# Altium PCB IOT_IO_v0.PcbDoc (part 2 of 3)
Units mil, origin at the board's own origin, x right, y up, seen from the top; angles counter-clockwise.
Board outline 8196.85 x 3393.7 mil, 2 copper layers (Top Layer, Top, Bottom Layer, Bottom); 364 components, 308 nets, 1129 pads, 291 vias.
Unrouted connection lines stored in the file: 7.
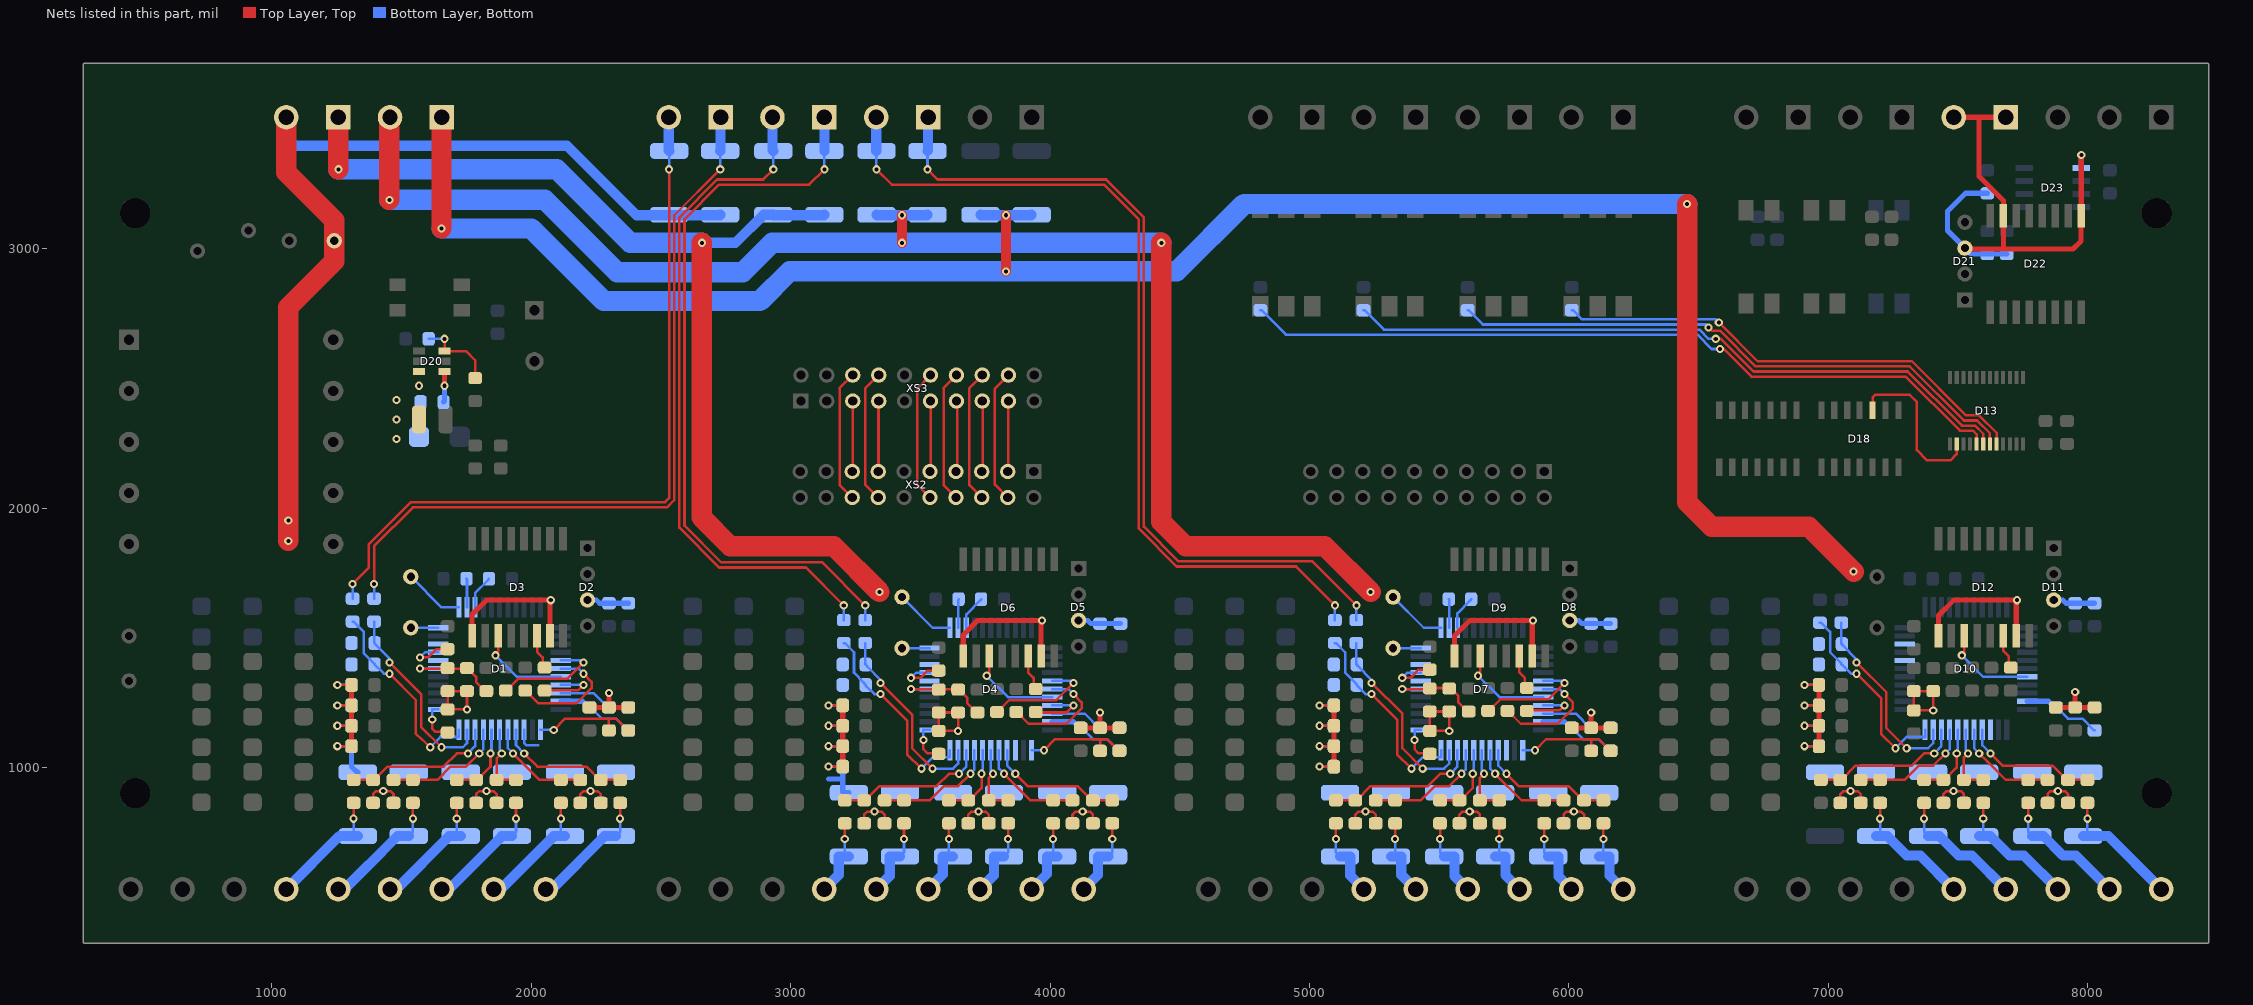
[diagram p2: the nets of this part, all layers, seen from the top]

## Via types
v1: diameter 31.5, hole 15.75, Top Layer, Top to Bottom Layer, Bottom, 291 vias

## Nets (pads, with @x,y where several pads share a name; then routed paths per layer and width w, separated by ;. In a path a pad name is that pad's centre, name@x,y a point inside that pad or via, vN(x,y) a via of type N, cw(c..) or ccw(c..) an arc to the next point about the centre after c; other vN are vias at no path point) (continued)
GND1: C1.1 C2.2 C3.2 C4.2 C5.2 C6.2 C7.2 C8.1 C9.1 C10.1 C11.1 C12.1 C13.1 C14.2 C15.1 C16.1 C17.1 C69.1 C70.1 C71.1 C72.1 D1.3 D1.18 D1.20 D1.43 D2.3 D3.9 D3.15 FU1.1 R2.1 R3.2 R4.2 R5.2 R6.2 R7.2 R8.2 R9.2 R10.2 R137.1 R138.1 R139.1 R140.1 XT22.2 | length 6540.2
  Top Layer, Top w9.84: v1(1251.97,1082.68) C69.1@1307.09,1082.68 ; v1(1251.97,1161.42) C70.1@1307.09,1161.42 ; v1(1251.97,1240.16) C71.1@1307.09,1240.16 ; v1(1251.97,1318.9) C72.1@1307.09,1318.9 ; C6.2@1389.76,864.17 1389.76,897.64 1401.57,909.45 v1(1429.13,909.45) 1456.69,909.45 1468.5,897.64 C7.2@1468.5,864.17 ; C4.2@1787.4,864.17 1787.4,897.64 1799.21,909.45 v1(1826.77,909.45) 1854.33,909.45 1866.14,897.64 C5.2@1866.14,864.17 ; C2.2@2188.98,864.17 2188.98,897.64 2200.79,909.45 v1(2228.35,909.45) 2255.91,909.45 2267.72,897.64 C3.2@2267.72,864.17 ; C12.1@1677.17,1224.41 v1(1751.97,1224.41) R2.1@1751.97,1295.28 C1.1@1677.17,1295.28 C12.1@1677.17,1224.41
  Top Layer, Top w19.68: C69.1@1307.09,1082.68 C70.1@1307.09,1161.42 C71.1@1307.09,1240.16 C72.1@1307.09,1318.9 ; D3.9@1772.05,1509.25 1771.65,1509.65 1771.65,1590.55 1826.77,1645.67 v1(2074.8,1645.67) 2072.05,1644.49 D3.15@2072.05,1509.25 ; C17.1@2224.41,1232.28 C10.1@2299.21,1232.28 ; v1(2299.21,1287.4) C10.1@2299.21,1232.28 ; C11.1@2374.02,1232.28 C10.1@2299.21,1232.28
  Top Layer, Top w78.74: XT22.2@1055.12,3507.87 1055.12,3295.28 1240.16,3110.24 FU1.1@1240.16,3031.5 1240.16,2952.76 1062.99,2775.59 v1(1062.99,1952.76) v1(1062.99,1874.02)
  Bottom Layer, Bottom w9.84: v1(1251.97,1082.68) R137.1@1307.09,1082.68 ; v1(1251.97,1161.42) R138.1@1307.09,1161.42 ; v1(1251.97,1240.16) R139.1@1307.09,1240.16 ; v1(1251.97,1318.9) R140.1@1307.09,1318.9 ; D1.3@1972.44,1145.67 1972.44,1094.49 1980.32,1086.61 2027.56,1086.61 ; C15.1@2224.41,1232.28 2228.35,1232.28 2271.65,1188.98 2326.77,1188.98 2370.08,1145.67 2374.02,1145.67 C14.2@2374.02,1143.7
  Bottom Layer, Bottom w19.68: R137.1@1307.09,1082.68 1307.09,1003.94 1329.72,981.3 1330.71,980.32 R7.2@1330.71,982.28 ; D1.43@2114.17,1255.91 2196.85,1255.91 2220.47,1232.28 C15.1@2224.41,1232.28 ; D2.3@2216.54,1646.46 2217.32,1645.67 2251.97,1645.67 2263.78,1633.86 C13.1@2299.21,1633.86 C16.1@2374.02,1633.86
  Bottom Layer, Bottom w39.37: XT22.2@1055.12,3507.87 1055.12,3433.07 1090.55,3397.64 2137.8,3397.64 2405.51,3129.92 R10.2@2533.46,3129.92 ; R10.2@2531.5,3131.89 R10.2@2533.46,3129.92 ; R9.2@2728.35,3131.89 2726.38,3129.92 R10.2@2533.46,3129.92
GND2: C18.1 C19.2 C20.2 C21.2 C22.2 C23.2 C24.2 C25.1 C26.1 C27.1 C28.1 C29.1 C30.1 C31.2 C32.1 C33.1 C34.1 C73.1 C74.1 C75.1 C76.1 D4.3 D4.18 D4.20 D4.43 D5.3 D6.9 D6.15 R27.1 R28.2 R29.2 R30.2 R31.2 R32.2 R33.2 R34.2 R35.2 R141.1 R142.1 R143.1 R144.1 XT22.1 | length 6943.4
  Top Layer, Top w9.84: v1(3145.67,1003.94) C73.1@3200.79,1003.94 ; v1(3145.67,1082.68) C74.1@3200.79,1082.68 ; v1(3145.67,1161.42) C75.1@3200.79,1161.42 ; v1(3145.67,1240.16) C76.1@3200.79,1240.16 ; C23.2@3283.46,785.43 3283.46,818.9 3295.28,830.71 v1(3322.83,830.71) 3350.39,830.71 3362.2,818.9 C24.2@3362.2,785.43 ; C21.2@3685.04,785.43 3685.04,818.9 3696.85,830.71 v1(3724.41,830.71) 3751.97,830.71 3763.78,818.9 C22.2@3763.78,785.43 ; C19.2@4086.61,785.43 4086.61,818.9 4098.43,830.71 v1(4125.98,830.71) 4153.54,830.71 4165.35,818.9 C20.2@4165.35,785.43 ; C29.1@3570.87,1141.73 v1(3645.67,1141.73) R27.1@3645.67,1212.6 C18.1@3570.87,1212.6 C29.1@3570.87,1141.73
  Top Layer, Top w19.68: C73.1@3200.79,1003.94 C74.1@3200.79,1082.68 C75.1@3200.79,1161.42 C76.1@3200.79,1240.16 ; D6.9@3665.75,1430.51 3665.35,1430.91 3665.35,1511.81 3720.47,1566.93 v1(3968.5,1566.93) 3965.75,1565.75 D6.15@3965.75,1430.51 ; D5.3@4109.45,1566.93 D5.3@4110.24,1567.72 ; C34.1@4118.11,1153.54 C27.1@4192.91,1153.54 ; v1(4192.91,1212.6) C27.1@4192.91,1153.54 ; C28.1@4267.72,1153.54 C27.1@4192.91,1153.54
  Top Layer, Top w39.37: XT22.1@1255.12,3507.87 XT22.1@1255.91,3507.09
  Top Layer, Top w78.74: v1(1255.91,3307.09) XT22.1@1255.91,3507.09 ; v1(2657.48,3023.62) 2657.48,1964.57 2767.72,1854.33 3165.35,1854.33 v1(3342.52,1677.17)
  Bottom Layer, Bottom w9.84: v1(3145.67,1003.94) R141.1@3200.79,1003.94 ; v1(3145.67,1082.68) R142.1@3200.79,1082.68 ; v1(3145.67,1161.42) R143.1@3200.79,1161.42 ; v1(3145.67,1240.16) R144.1@3200.79,1240.16 ; C32.1@4118.11,1153.54 4122.05,1153.54 4165.35,1110.24 4220.47,1110.24 4263.78,1066.93 4265.75,1066.93 C31.2@4267.72,1064.96
  Bottom Layer, Bottom w19.68: 3145.67,956.69 3200.79,956.69 ; R141.1@3200.79,1003.94 3200.79,956.69 ; R32.2@3224.41,903.54 3202.76,903.54 3200.79,905.51 3200.79,956.69 ; D4.43@4007.87,1177.17 4090.55,1177.17 4114.17,1153.54 C32.1@4118.11,1153.54 ; D5.3@4110.24,1567.72 4111.02,1566.93 4145.67,1566.93 4157.48,1555.12 C30.1@4192.91,1555.12 C33.1@4271.65,1555.12
  Bottom Layer, Bottom w39.37: v1(2657.48,3023.62) 2787.4,3023.62 2895.67,3131.89 R35.2@2933.07,3131.89 2935.04,3129.92 3127.95,3129.92 R34.2@3129.92,3131.89
  Bottom Layer, Bottom w78.74: v1(1255.91,3307.09) 2098.43,3307.09 2381.89,3023.62 v1(2657.48,3023.62)
GND3: C35.1 C36.2 C37.2 C38.2 C39.2 C40.2 C41.2 C42.1 C43.1 C44.1 C45.1 C46.1 C47.1 C48.2 C49.1 C50.1 C51.1 C77.1 C78.1 C79.1 C80.1 D7.3 D7.18 D7.20 D7.43 D8.3 D9.9 D9.15 R52.1 R53.2 R54.2 R55.2 R56.2 R57.2 R58.2 R59.2 R60.2 R181.1 R182.1 R183.1 R184.1 XT18.2 | length 8423.1
  Top Layer, Top w9.84: v1(5039.37,1003.94) C77.1@5094.49,1003.94 ; v1(5039.37,1082.68) C78.1@5094.49,1082.68 ; v1(5039.37,1161.42) C79.1@5094.49,1161.42 ; v1(5039.37,1240.16) C80.1@5094.49,1240.16 ; C40.2@5177.17,785.43 5177.17,818.9 5188.98,830.71 v1(5216.54,830.71) 5244.09,830.71 5255.91,818.9 C41.2@5255.91,785.43 ; C38.2@5578.74,785.43 5578.74,818.9 5590.55,830.71 v1(5618.11,830.71) 5645.67,830.71 5657.48,818.9 C39.2@5657.48,785.43 ; C36.2@5980.31,785.43 5980.31,818.9 5992.13,830.71 v1(6019.69,830.71) 6047.24,830.71 6059.06,818.9 C37.2@6059.06,785.43 ; C46.1@5464.57,1141.73 C35.1@5464.57,1216.54 R52.1@5539.37,1216.54 v1(5539.37,1141.73) C46.1@5464.57,1141.73
  Top Layer, Top w19.68: C77.1@5094.49,1003.94 C78.1@5094.49,1082.68 C79.1@5094.49,1161.42 C80.1@5094.49,1240.16 ; D9.9@5559.45,1430.51 5559.45,1508.27 5618.11,1566.93 v1(5862.2,1566.93) 5859.45,1565.75 D9.15@5859.45,1430.51 ; D8.3@6003.15,1566.93 D8.3@6003.94,1567.72 ; C51.1@6011.81,1153.54 C44.1@6086.61,1153.54 ; v1(6086.61,1212.6) C44.1@6086.61,1153.54 ; C45.1@6161.42,1153.54 C44.1@6086.61,1153.54
  Top Layer, Top w39.37: v1(3429.13,3023.62) v1(3429.13,3129.92)
  Top Layer, Top w78.74: v1(1452.76,3188.98) 1452.76,3505.51 XT18.2@1455.12,3507.87 ; v1(4429.13,3023.62) 4429.13,1948.82 4523.62,1854.33 5059.06,1854.33 v1(5236.22,1677.17)
  Bottom Layer, Bottom w9.84: v1(5039.37,1003.94) R181.1@5094.49,1003.94 ; v1(5039.37,1082.68) R182.1@5094.49,1082.68 ; v1(5039.37,1161.42) R183.1@5094.49,1161.42 ; v1(5039.37,1240.16) R184.1@5094.49,1240.16 ; C49.1@6011.81,1153.54 6055.12,1110.24 6114.17,1110.24 6157.48,1066.93 6159.45,1066.93 C48.2@6161.42,1064.96
  Bottom Layer, Bottom w19.68: D7.43@5901.57,1177.17 5984.25,1177.17 6007.87,1153.54 C49.1@6011.81,1153.54 ; D8.3@6003.94,1567.72 6038.58,1567.72 6051.18,1555.12 C47.1@6086.61,1555.12 C50.1@6161.42,1555.12
  Bottom Layer, Bottom w39.37: R60.2@3330.71,3131.89 3332.68,3129.92 v1(3429.13,3129.92) 3525.59,3129.92 R59.2@3527.56,3131.89
  Bottom Layer, Bottom w78.74: v1(1452.76,3188.98) 2051.18,3188.98 2330.71,2909.45 2814.96,2909.45 2929.13,3023.62 v1(3429.13,3023.62) v1(4429.13,3023.62)
GND4: C52.1 C53.2 C54.2 C55.2 C56.2 C57.2 C58.2 C59.1 C60.1 C61.1 C62.1 C63.1 C64.1 C65.2 C66.1 C67.1 C68.1 C81.1 C82.1 C83.1 C84.1 D10.3 D10.18 D10.20 D10.43 D11.3 D12.9 D12.15 R77.1 R78.2 R79.2 R80.2 R81.2 R82.2 R83.2 R84.2 R85.2 R185.1 R186.1 R187.1 R188.1 XT18.1 | length 10485.5
  Top Layer, Top w9.84: v1(6909.45,1082.68) C81.1@6964.57,1082.68 ; v1(6909.45,1161.42) C82.1@6964.57,1161.42 ; v1(6909.45,1240.16) C83.1@6964.57,1240.16 ; v1(6909.45,1318.9) C84.1@6964.57,1318.9 ; C57.2@7047.24,864.17 7047.24,897.64 7059.06,909.45 v1(7086.61,909.45) 7114.17,909.45 7125.98,897.64 C58.2@7125.98,864.17 ; C55.2@7444.88,864.17 7444.88,897.64 7456.69,909.45 v1(7484.25,909.45) 7511.81,909.45 7523.62,897.64 C56.2@7523.62,864.17 ; C53.2@7846.46,864.17 7846.46,897.64 7858.27,909.45 v1(7885.83,909.45) 7913.39,909.45 7925.2,897.64 C54.2@7925.2,864.17 ; C63.1@7330.71,1220.47 C52.1@7330.71,1295.28 R77.1@7405.51,1295.28 v1(7405.51,1220.47) C63.1@7330.71,1220.47
  Top Layer, Top w19.68: C81.1@6964.57,1082.68 C82.1@6964.57,1161.42 C83.1@6964.57,1240.16 C84.1@6964.57,1318.9 ; D12.9@7425.59,1509.25 7425.59,1587.01 7484.25,1645.67 v1(7728.35,1645.67) 7725.59,1644.49 D12.15@7725.59,1509.25 ; D11.3@7869.29,1645.67 D11.3@7870.08,1646.46 ; C68.1@7877.95,1232.28 C61.1@7952.76,1232.28 ; v1(7952.76,1291.34) C61.1@7952.76,1232.28 ; C62.1@8027.56,1232.28 C61.1@7952.76,1232.28
  Top Layer, Top w39.37: v1(3830.71,2913.39) v1(3830.71,3129.92)
  Top Layer, Top w78.74: v1(1653.54,3078.74) 1653.54,3506.3 XT18.1@1655.12,3507.87 ; v1(6456.69,3173.23) 6456.69,2023.62 6551.18,1929.13 6925.2,1929.13 v1(7098.43,1755.91)
  Bottom Layer, Bottom w9.84: v1(6909.45,1082.68) R185.1@6964.57,1082.68 ; v1(6909.45,1161.42) R186.1@6964.57,1161.42 ; v1(6909.45,1240.16) R187.1@6964.57,1240.16 ; v1(6909.45,1318.9) R188.1@6964.57,1318.9 ; C66.1@7877.95,1232.28 7881.89,1232.28 7925.2,1188.98 7980.31,1188.98 8025.59,1143.7 C65.2@8027.56,1143.7
  Bottom Layer, Bottom w19.68: D10.43@7767.72,1255.91 7850.39,1255.91 7874.02,1232.28 C66.1@7877.95,1232.28 ; D11.3@7870.08,1646.46 7904.72,1646.46 7917.32,1633.86 C64.1@7952.76,1633.86 C67.1@8027.56,1633.86
  Bottom Layer, Bottom w39.37: R85.2@3732.28,3131.89 3734.25,3129.92 v1(3830.71,3129.92) 3927.17,3129.92 R84.2@3929.13,3131.89
  Bottom Layer, Bottom w78.74: v1(1653.54,3078.74) 2000,3078.74 2279.53,2799.21 2881.89,2799.21 2996.06,2913.39 v1(3830.71,2913.39) 4488.19,2913.39 4748.03,3173.23 v1(6456.69,3173.23)
GNDR: C90.1 C91.1 D21.3 D22.9 D22.15 D23.5 R201.2 XT25.1 XT25.2 | length 2115.2
  Top Layer, Top w19.68: XT25.2@7485.04,3507.87 7582.68,3507.87 ; D21.3@7527.56,3003.15 7530.71,3000 7677.17,3000 ; XT25.1@7685.04,3507.87 7582.68,3507.87 ; v1(7976.38,3362.2) 7976.38,3128.94 D22.9@7975.98,3128.54 7975.98,3031.1 7944.88,3000 7677.17,3000 ; 7582.68,3507.87 7582.68,3279.53 7675.98,3186.22 D22.15@7675.98,3128.54 7675.98,3001.18 7677.17,3000
  Bottom Layer, Bottom w19.68: R201.2@7614.17,3214.57 7529.53,3214.57 7460.63,3145.67 7460.63,3070.87 7527.56,3003.94 D21.3@7527.56,3003.15 7550.39,2980.32 C90.1@7614.17,2980.32 C91.1@7688.98,2980.32 ; D23.5@7975.59,3311.42 7976.38,3312.2 v1(7976.38,3362.2)
IAN_1: C3.1 D1.4 R12.1 | length 516.1
  Top Layer, Top w9.84: v1(1972.44,1055.12) 2023.62,1003.94 2212.6,1003.94 2263.78,952.76 C3.1@2267.72,952.76 R12.1@2342.52,952.76
  Bottom Layer, Bottom w9.84: D1.4@1940.94,1145.67 1940.94,1086.61 v1(1972.44,1055.12)
IAN_2: C20.1 D4.4 R37.1 | length 520
  Top Layer, Top w9.84: v1(3866.14,976.38) 3913.39,929.13 4106.3,929.13 4161.42,874.02 C20.1@4165.35,874.02 R37.1@4240.16,874.02
  Bottom Layer, Bottom w9.84: D4.4@3834.65,1066.93 3834.65,1007.87 v1(3866.14,976.38)
IAN_3: C37.1 D7.4 R62.1 | length 520
  Top Layer, Top w9.84: v1(5759.84,976.38) 5807.09,929.13 6000,929.13 6055.12,874.02 C37.1@6059.06,874.02 R62.1@6133.86,874.02
  Bottom Layer, Bottom w9.84: D7.4@5728.35,1066.93 5728.35,1007.87 v1(5759.84,976.38)
IAN_4: C54.1 D10.4 R87.1 | length 520
  Top Layer, Top w9.84: v1(7625.98,1055.12) 7673.23,1007.87 7866.14,1007.87 7921.26,952.76 C54.1@7925.2,952.76 R87.1@8000,952.76
  Bottom Layer, Bottom w9.84: D10.4@7594.49,1145.67 7594.49,1086.61 v1(7625.98,1055.12)
IAP_1: C2.1 D1.5 R11.1 | length 400.9
  Top Layer, Top w9.84: v1(1929.13,1055.12) 1960.63,1023.62 2031.5,952.76 R11.1@2114.17,952.76 C2.1@2188.98,952.76
  Bottom Layer, Bottom w9.84: D1.5@1909.45,1145.67 1909.45,1074.8 v1(1929.13,1055.12)
IAP_2: C19.1 D4.5 R36.1 | length 404.9
  Top Layer, Top w9.84: v1(3822.83,976.38) 3925.2,874.02 R36.1@4011.81,874.02 C19.1@4086.61,874.02
  Bottom Layer, Bottom w9.84: D4.5@3803.15,1066.93 3803.15,996.06 v1(3822.83,976.38)
IAP_3: C36.1 D7.5 R61.1 | length 404.9
  Top Layer, Top w9.84: v1(5716.54,976.38) 5818.9,874.02 R61.1@5905.51,874.02 C36.1@5980.31,874.02
  Bottom Layer, Bottom w9.84: D7.5@5696.85,1066.93 5696.85,996.06 v1(5716.54,976.38)
IAP_4: C53.1 D10.5 R86.1 | length 404.9
  Top Layer, Top w9.84: v1(7582.68,1055.12) 7614.17,1023.62 7685.04,952.76 R86.1@7771.65,952.76 C53.1@7846.46,952.76
  Bottom Layer, Bottom w9.84: D10.5@7562.99,1145.67 7562.99,1074.8 v1(7582.68,1055.12)
IBN_1: C5.1 D1.6 R14.1 | length 279.1
  Top Layer, Top w9.84: v1(1885.83,1055.12) 1866.14,1035.43 C5.1@1866.14,952.76 R14.1@1940.94,952.76
  Bottom Layer, Bottom w9.84: D1.6@1877.95,1145.67 1877.95,1062.99 v1(1885.83,1055.12)
IBN_2: C22.1 D4.6 R39.1 | length 277.5
  Top Layer, Top w9.84: v1(3779.53,976.38) 3763.78,960.63 C22.1@3763.78,874.02 R39.1@3838.58,874.02
  Bottom Layer, Bottom w9.84: D4.6@3771.65,1066.93 3771.65,984.25 v1(3779.53,976.38)
IBN_3: C39.1 D7.6 R64.1 | length 277.5
  Top Layer, Top w9.84: v1(5673.23,976.38) 5657.48,960.63 C39.1@5657.48,874.02 R64.1@5732.28,874.02
  Bottom Layer, Bottom w9.84: D7.6@5665.35,1066.93 5665.35,984.25 v1(5673.23,976.38)
IBN_4: C56.1 D10.6 R89.1 | length 276.6
  Top Layer, Top w9.84: v1(7539.37,1055.12) 7523.62,1039.37 C56.1@7523.62,952.76 R89.1@7598.43,952.76
  Bottom Layer, Bottom w9.84: D10.6@7531.5,1145.67 7531.5,1066.93 v1(7539.37,1055.12)
IBP_1: C4.1 D1.7 R13.1 | length 294.5
  Top Layer, Top w9.84: R13.1@1712.6,952.76 C4.1@1787.4,952.76 1791.34,952.76 1842.52,1003.94 v1(1842.52,1055.12)
  Bottom Layer, Bottom w9.84: v1(1842.52,1055.12) 1846.46,1059.06 D1.7@1846.46,1145.67
IBP_2: C21.1 D4.7 R38.1 | length 292.9
  Top Layer, Top w9.84: R38.1@3610.24,874.02 C21.1@3685.04,874.02 3688.98,874.02 3736.22,921.26 v1(3736.22,976.38)
  Bottom Layer, Bottom w9.84: v1(3736.22,976.38) 3740.16,980.32 D4.7@3740.16,1066.93
IBP_3: C38.1 D7.7 R63.1 | length 292.9
  Top Layer, Top w9.84: R63.1@5503.94,874.02 C38.1@5578.74,874.02 5582.68,874.02 5629.92,921.26 v1(5629.92,976.38)
  Bottom Layer, Bottom w9.84: v1(5629.92,976.38) 5633.86,980.32 D7.7@5633.86,1066.93
IBP_4: C55.1 D10.7 R88.1 | length 291.9
  Top Layer, Top w9.84: R88.1@7370.08,952.76 C55.1@7444.88,952.76 7448.82,952.76 7496.06,1000 v1(7496.06,1055.12)
  Bottom Layer, Bottom w9.84: v1(7496.06,1055.12) 7500,1066.93 D10.7@7500,1145.67
ICN_1: C7.1 D1.8 R16.1 | length 470.2
  Top Layer, Top w9.84: C7.1@1468.5,952.76 R16.1@1543.31,952.76 1637.8,952.76 1688.98,1003.94 1748.03,1003.94 v1(1799.21,1055.12)
  Bottom Layer, Bottom w9.84: v1(1799.21,1055.12) 1814.96,1070.87 D1.8@1814.96,1145.67
ICN_2: C24.1 D4.8 R41.1 | length 470.2
  Top Layer, Top w9.84: C24.1@3362.2,874.02 R41.1@3437.01,874.02 3535.43,874.02 3590.55,929.13 3645.67,929.13 v1(3692.91,976.38)
  Bottom Layer, Bottom w9.84: v1(3692.91,976.38) 3708.66,992.13 D4.8@3708.66,1066.93
ICN_3: C41.1 D7.8 R66.1 | length 470.2
  Top Layer, Top w9.84: C41.1@5255.91,874.02 R66.1@5330.71,874.02 5429.13,874.02 5484.25,929.13 5539.37,929.13 v1(5586.61,976.38)
  Bottom Layer, Bottom w9.84: v1(5586.61,976.38) 5602.36,992.13 D7.8@5602.36,1066.93
ICN_4: C58.1 D10.8 R91.1 | length 466.2
  Top Layer, Top w9.84: C58.1@7125.98,952.76 R91.1@7200.79,952.76 7295.28,952.76 7350.39,1007.87 7405.51,1007.87 v1(7452.76,1055.12)
  Bottom Layer, Bottom w9.84: v1(7452.76,1055.12) 7468.5,1070.87 D10.8@7468.5,1145.67
ICP_1: C6.1 D1.9 R15.1 | length 585.3
  Top Layer, Top w9.84: R15.1@1314.96,952.76 C6.1@1389.76,952.76 1393.7,952.76 1444.88,1003.94 1661.42,1003.94 1712.6,1055.12 v1(1755.91,1055.12)
  Bottom Layer, Bottom w9.84: v1(1755.91,1055.12) 1783.46,1082.68 D1.9@1783.46,1145.67
ICP_2: C23.1 D4.9 R40.1 | length 585.3
  Top Layer, Top w9.84: R40.1@3208.66,874.02 C23.1@3283.46,874.02 3287.4,874.02 3342.52,929.13 3562.99,929.13 3610.24,976.38 v1(3649.61,976.38)
  Bottom Layer, Bottom w9.84: v1(3649.61,976.38) 3677.17,1003.94 D4.9@3677.17,1066.93
ICP_3: C40.1 D7.9 R65.1 | length 585.3
  Top Layer, Top w9.84: R65.1@5102.36,874.02 C40.1@5177.17,874.02 5181.1,874.02 5236.22,929.13 5456.69,929.13 5503.94,976.38 v1(5543.31,976.38)
  Bottom Layer, Bottom w9.84: v1(5543.31,976.38) 5570.87,1003.94 D7.9@5570.87,1066.93
ICP_4: C57.1 D10.9 R90.1 | length 581.4
  Top Layer, Top w9.84: R90.1@6972.44,952.76 C57.1@7047.24,952.76 7051.18,952.76 7106.3,1007.87 7322.83,1007.87 7370.08,1055.12 v1(7409.45,1055.12)
  Bottom Layer, Bottom w9.84: v1(7409.45,1055.12) 7437.01,1082.68 D10.9@7437.01,1145.67
INN_1: C8.2 D1.10 R17.1 | length 748
  Top Layer, Top w9.84: v1(1452.76,1405.51) 1574.8,1283.46 1574.8,1157.48 v1(1653.54,1078.74)
  Bottom Layer, Bottom w9.84: R17.1@1393.7,1562.99 1393.7,1482.28 C8.2@1395.67,1480.32 1397.64,1478.35 1397.64,1476.38 1452.76,1421.26 v1(1452.76,1405.51) ; v1(1653.54,1078.74) 1736.22,1078.74 1751.97,1094.49 D1.10@1751.97,1145.67
INN_2: C25.2 D4.10 R42.1 | length 749.6
  Top Layer, Top w9.84: v1(3346.46,1326.77) 3468.5,1204.72 3468.5,1074.8 v1(3547.24,996.06)
  Bottom Layer, Bottom w9.84: R42.1@3287.4,1480.32 3287.4,1399.61 C25.2@3289.37,1397.64 3295.28,1391.73 3295.28,1389.76 3346.46,1338.58 v1(3346.46,1326.77) ; v1(3547.24,996.06) 3625.98,996.06 3645.67,1015.75 D4.10@3645.67,1066.93
INN_3: C42.2 D7.10 R67.1 | length 751.9
  Top Layer, Top w9.84: v1(5240.16,1326.77) 5358.27,1208.66 5358.27,1074.8 v1(5437.01,996.06)
  Bottom Layer, Bottom w9.84: R67.1@5181.1,1480.32 5181.1,1399.61 C42.2@5183.07,1397.64 5185.04,1395.67 5185.04,1393.7 5240.16,1338.58 v1(5240.16,1326.77) ; v1(5437.01,996.06) 5519.69,996.06 5539.37,1015.75 D7.10@5539.37,1066.93
INN_4: C60.2 D10.10 R93.1 | length 750.3
  Top Layer, Top w9.84: v1(7110.24,1405.51) 7224.41,1291.34 7224.41,1153.54 v1(7303.15,1074.8)
  Bottom Layer, Bottom w9.84: R93.1@7051.18,1559.06 7051.18,1478.35 C60.2@7053.15,1476.38 7055.12,1474.41 7055.12,1472.44 7110.24,1417.32 v1(7110.24,1405.51) ; v1(7303.15,1074.8) 7385.83,1074.8 7405.51,1094.49 D10.10@7405.51,1145.67
INP_1: C9.2 D1.11 R18.1 | length 778.5
  Top Layer, Top w9.84: v1(1452.76,1362.2) 1555.12,1259.84 1555.12,1129.92 v1(1610.24,1078.74)
  Bottom Layer, Bottom w9.84: R18.1@1311.02,1562.99 1314.96,1562.99 1354.33,1523.62 1354.33,1440.94 1395.67,1399.61 C9.2@1395.67,1397.64 1431.1,1362.2 v1(1452.76,1362.2) ; v1(1610.24,1078.74) 1649.61,1118.11 1720.47,1118.11 D1.11@1720.47,1145.67
INP_2: C26.2 D4.11 R43.1 | length 780.1
  Top Layer, Top w9.84: v1(3346.46,1283.46) 3448.82,1181.1 3448.82,1051.18 v1(3503.94,996.06)
  Bottom Layer, Bottom w9.84: R43.1@3204.72,1480.32 3208.66,1480.32 3244.09,1444.88 3244.09,1366.14 3283.46,1326.77 3283.46,1324.8 C26.2@3289.37,1318.9 3289.37,1316.93 3322.83,1283.46 v1(3346.46,1283.46) ; v1(3503.94,996.06) 3547.24,1039.37 3614.17,1039.37 D4.11@3614.17,1066.93
INP_3: C43.2 D7.11 R68.1 | length 782.4
  Top Layer, Top w9.84: v1(5240.16,1283.46) 5338.58,1185.04 5338.58,1051.18 v1(5393.7,996.06)
  Bottom Layer, Bottom w9.84: R68.1@5098.43,1480.32 5102.36,1480.32 5137.8,1444.88 5137.8,1366.14 5181.1,1322.83 5181.1,1320.87 C43.2@5183.07,1318.9 5185.04,1316.93 5185.04,1314.96 5216.54,1283.46 v1(5240.16,1283.46) ; v1(5393.7,996.06) 5437.01,1039.37 5507.87,1039.37 D7.11@5507.87,1066.93
INP_4: C59.2 D10.11 R92.1 | length 779.6
  Top Layer, Top w9.84: v1(7110.24,1362.2) 7204.72,1267.72 7204.72,1129.92 v1(7259.84,1074.8)
  Bottom Layer, Bottom w9.84: R92.1@6968.5,1559.06 6972.44,1559.06 7007.87,1523.62 7007.87,1444.88 7051.18,1401.57 7051.18,1399.61 C59.2@7053.15,1397.64 7088.58,1362.2 v1(7110.24,1362.2) ; v1(7259.84,1074.8) 7303.15,1118.11 7374.02,1118.11 D10.11@7374.02,1145.67
K1: D13.17 R197.1 | length 2997.4
  Top Layer, Top w9.84: v1(6582.68,2614.17) 6598.43,2614.17 6704.72,2507.87 7299.21,2507.87 7507.87,2299.21 7559.06,2299.21 7572.83,2285.43 D13.17@7572.83,2248.03
  Bottom Layer, Bottom w9.84: R197.1@4811.02,2763.78 4814.96,2763.78 4909.45,2669.29 6496.06,2669.29 6551.18,2614.17 v1(6582.68,2614.17)
K2: D13.18 R198.1 | length 2626.5
  Top Layer, Top w9.84: v1(6566.93,2653.54) 6586.61,2653.54 6712.6,2527.56 7307.09,2527.56 7515.75,2318.9 7566.93,2318.9 7598.43,2287.4 D13.18@7598.43,2248.03
  Bottom Layer, Bottom w9.84: R198.1@5208.66,2763.78 5212.6,2763.78 5287.4,2688.98 6503.94,2688.98 6539.37,2653.54 v1(6566.93,2653.54)
K3: D13.19 R199.1 | length 2251.6
  Top Layer, Top w9.84: v1(6539.37,2696.85) 6551.18,2685.04 6582.68,2685.04 6720.47,2547.24 7314.96,2547.24 7523.62,2338.58 7574.8,2338.58 7624.02,2289.37 D13.19@7624.02,2248.03
  Bottom Layer, Bottom w9.84: R199.1@5610.24,2763.78 5614.17,2763.78 5669.29,2708.66 6527.56,2708.66 v1(6539.37,2696.85)
K4: D13.20 R200.1 | length 1876.8
  Top Layer, Top w9.84: v1(6578.74,2716.54) 6728.35,2566.93 7322.83,2566.93 7531.5,2358.27 7582.68,2358.27 7649.61,2291.34 D13.20@7649.61,2248.03
  Bottom Layer, Bottom w9.84: R200.1@6011.81,2763.78 6015.75,2763.78 6051.18,2728.35 6566.93,2728.35 v1(6578.74,2716.54)
MISO_1: D1.40 D3.11 | length 366.5
  Top Layer, Top w9.84: v1(1862.2,1433.07) 1872.05,1442.91 D3.11@1872.05,1509.25
  Bottom Layer, Bottom w9.84: v1(1862.2,1433.07) 1944.88,1350.39 D1.40@2114.17,1350.39
MISO_2: D4.40 D6.11 | length 366.5
  Top Layer, Top w9.84: v1(3755.91,1354.33) 3765.75,1364.17 D6.11@3765.75,1430.51
  Bottom Layer, Bottom w9.84: v1(3755.91,1354.33) 3838.58,1271.65 D4.40@4007.87,1271.65
MISO_3: D7.40 D9.11 | length 366.5
  Top Layer, Top w9.84: v1(5649.61,1354.33) 5659.45,1364.17 D9.11@5659.45,1430.51
  Bottom Layer, Bottom w9.84: v1(5649.61,1354.33) 5732.28,1271.65 D7.40@5901.57,1271.65
MISO_4: D10.40 D12.11 | length 366.5
  Top Layer, Top w9.84: v1(7515.75,1433.07) 7525.59,1442.91 D12.11@7525.59,1509.25
  Bottom Layer, Bottom w9.84: v1(7515.75,1433.07) 7598.43,1350.39 D10.40@7767.72,1350.39
MOSI_1: D3.14 R21.1 | length 135.5
  Top Layer, Top w9.84: D3.14@2022.05,1509.25 2022.05,1446.46 2043.31,1425.2 2043.31,1393.7 R21.1@2051.18,1385.83
MOSI_2: D6.14 R46.1 | length 139.4
  Top Layer, Top w9.84: D6.14@3915.75,1430.51 3915.75,1367.72 3937.01,1346.46 3937.01,1311.02 R46.1@3944.88,1303.15
MOSI_3: D9.14 R71.1 | length 135.5
  Top Layer, Top w9.84: D9.14@5809.45,1430.51 5809.45,1367.72 5830.71,1346.46 5830.71,1314.96 R71.1@5838.58,1307.09
MOSI_4: D12.14 R96.1 | length 135.5
  Top Layer, Top w9.84: D12.14@7675.59,1509.25 7675.59,1450.39 7696.85,1429.13 7696.85,1393.7 R96.1@7704.72,1385.83
NET00000: D1.19 R19.1 | length 198.4
  Top Layer, Top w9.84: v1(1570.87,1425.2) 1602.36,1425.2 1633.86,1456.69 R19.1@1677.17,1456.69
  Bottom Layer, Bottom w9.84: v1(1570.87,1425.2) 1590.55,1444.88 D1.19@1641.73,1444.88
NET00001: R3.1 R11.2 XT1.1 | length 494.5
  Top Layer, Top w9.84: v1(2114.17,803.15) R11.2@2114.17,864.17
  Bottom Layer, Bottom w9.84: v1(2114.17,803.15) 2114.17,751.97 R3.1@2129.92,736.22
  Bottom Layer, Bottom w39.37: XT1.1@1855.12,531.5 1882.68,531.5 2086.61,735.43 2086.61,736.22 R3.1@2129.92,736.22
NET00002: R4.1 R12.2 XT1.2 | length 490.9
  Top Layer, Top w9.84: v1(2342.52,803.15) R12.2@2342.52,864.17
  Bottom Layer, Bottom w9.84: R4.1@2326.77,736.22 2342.52,751.97 v1(2342.52,803.15)
  Bottom Layer, Bottom w39.37: XT1.2@2055.12,531.5 2078.74,531.5 2283.46,736.22 R4.1@2326.77,736.22
NET00003: D1.25 R24.2 | length 131.9
  Bottom Layer, Bottom w9.84: D1.25@1783.46,1618.11 1783.46,1673.23 1834.65,1724.41 R24.2@1836.61,1728.35
NET00004: D1.24 R25.2 | length 110.7
  Bottom Layer, Bottom w9.84: R25.2@1750,1728.35 1751.97,1724.41 D1.24@1751.97,1618.11
NET00005: D1.41 R21.2 | length 245.2
  Top Layer, Top w9.84: R21.2@2051.18,1297.24 2053.15,1299.21 2181.1,1299.21 v1(2200.79,1318.9)
  Bottom Layer, Bottom w9.84: D1.41@2114.17,1318.9 v1(2200.79,1318.9)
NET00006: D1.39 R22.2 | length 463.7
  Top Layer, Top w9.84: R22.2@1976.38,1297.24 1978.35,1297.24 2027.56,1248.03 2173.23,1248.03 2232.28,1307.09 2232.28,1330.71 v1(2200.79,1362.2)
  Bottom Layer, Bottom w9.84: D1.39@2114.17,1381.89 2181.1,1381.89 v1(2200.79,1362.2)
NET00007: D1.38 R23.2 | length 433.9
  Top Layer, Top w9.84: R23.2@1901.57,1297.24 1903.54,1297.24 1948.82,1342.52 2137.8,1342.52 v1(2200.79,1405.51)
  Bottom Layer, Bottom w9.84: D1.38@2114.17,1413.39 2192.91,1413.39 v1(2200.79,1405.51)
NET00008: C12.2 D1.12 | length 162.8
  Top Layer, Top w9.84: v1(1618.11,1185.04) 1618.11,1149.61 1629.92,1137.8 1673.23,1137.8 C12.2@1677.17,1135.83
  Bottom Layer, Bottom w9.84: v1(1618.11,1185.04) 1618.11,1224.41 D1.12@1641.73,1224.41
NET00009: R9.1 R17.2 XT4.1 | length 2984
  Top Layer, Top w9.84: v1(1393.7,1708.66) 1393.7,1854.33 1543.31,2003.94 2523.62,2003.94 2551.18,2031.5 2551.18,3129.92 v1(2728.35,3307.09)
  Bottom Layer, Bottom w9.84: R17.2@1393.7,1651.57 v1(1393.7,1708.66) ; v1(2728.35,3307.09) R9.1@2728.35,3377.95
  Bottom Layer, Bottom w39.37: R9.1@2728.35,3377.95 2729.92,3379.53 XT4.1@2729.92,3507.87
NET00010: R6.1 R14.2 XT2.2 | length 490.3
  Top Layer, Top w9.84: v1(1940.94,803.15) R14.2@1940.94,864.17
  Bottom Layer, Bottom w9.84: R6.1@1925.2,736.22 1940.94,751.97 v1(1940.94,803.15)
  Bottom Layer, Bottom w39.37: XT2.2@1655.12,531.5 1682.68,531.5 1885.83,734.65 1885.83,736.22 R6.1@1925.2,736.22
NET00011: R10.1 R18.2 XT4.2 | length 2936.7
  Top Layer, Top w9.84: v1(1311.02,1708.66) 1374.02,1771.65 1374.02,1862.2 1535.43,2023.62 2515.75,2023.62 2531.5,2039.37 v1(2531.5,3307.09)
  Bottom Layer, Bottom w9.84: R18.2@1311.02,1651.57 v1(1311.02,1708.66) ; v1(2531.5,3307.09) R10.1@2531.5,3377.95
  Bottom Layer, Bottom w39.37: XT4.2@2529.92,3507.87 2529.92,3379.53 R10.1@2531.5,3377.95
NET00012: D13.14 D18.3 | length 639.8
  Top Layer, Top w9.84: D18.3@7171.65,2377.95 7171.65,2427.56 7181.1,2437.01 7314.96,2437.01 7342.52,2409.45 7342.52,2224.41 7381.89,2185.04 7472.44,2185.04 7496.06,2208.66 D13.14@7496.06,2248.03
NET00013: R5.1 R13.2 XT2.1 | length 492.5
  Top Layer, Top w9.84: v1(1712.6,803.15) R13.2@1712.6,864.17
  Bottom Layer, Bottom w9.84: v1(1712.6,803.15) 1712.6,751.97 R5.1@1728.35,736.22
  Bottom Layer, Bottom w39.37: XT2.1@1455.12,531.5 1478.74,531.5 1683.46,736.22 R5.1@1728.35,736.22
NET00014: XS2.15 XS3.5 | length 272.9
  Top Layer, Top w9.84: XS2.15@3237.4,2141.73 3240.16,2144.49 3240.16,2409.45 XS3.5@3239.37,2413.39
NET00015: XS2.16 XS3.6 | length 512.6
  Top Layer, Top w9.84: XS2.16@3237.4,2041.73 3188.98,2090.16 3188.98,2462.99 XS3.6@3239.37,2513.39
NET00016: XS2.13 XS3.7 | length 272.2
  Top Layer, Top w9.84: XS2.13@3337.4,2141.73 3338.58,2142.91 3338.58,2409.45 XS3.7@3339.37,2413.39
NET00017: XS2.14 XS3.8 | length 513.9
  Top Layer, Top w9.84: XS2.14@3337.4,2041.73 3287.4,2091.73 3287.4,2461.42 XS3.8@3339.37,2513.39
NET00018: C10.2 C11.2 D1.1 | length 420.6
  Top Layer, Top w9.84: v1(2086.61,1145.67) 2129.92,1188.98 2299.21,1188.98 ; C10.2@2299.21,1143.7 2299.21,1188.98 ; C11.2@2374.02,1143.7 2372.05,1145.67 2370.08,1145.67 2326.77,1188.98 2299.21,1188.98
  Bottom Layer, Bottom w9.84: D1.1@2035.43,1145.67 v1(2086.61,1145.67)
NET00019: R8.1 R16.2 XT3.2 | length 491.7
  Top Layer, Top w9.84: v1(1543.31,803.15) R16.2@1543.31,864.17
  Bottom Layer, Bottom w9.84: R8.1@1527.56,736.22 1543.31,751.97 v1(1543.31,803.15)
  Bottom Layer, Bottom w39.37: XT3.2@1255.12,531.5 1278.74,531.5 1369.29,622.05 1370.08,622.05 1484.25,736.22 R8.1@1527.56,736.22
NET00020: R7.1 R15.2 XT3.1 | length 494.9
  Top Layer, Top w9.84: v1(1314.96,803.15) R15.2@1314.96,864.17
  Bottom Layer, Bottom w9.84: v1(1314.96,803.15) 1314.96,751.97 R7.1@1330.71,736.22
  Bottom Layer, Bottom w39.37: XT3.1@1055.12,531.5 1259.84,736.22 R7.1@1330.71,736.22
NET00021: C14.1 D1.42 R20.1 | length 282.7
  Bottom Layer, Bottom w9.84: D1.42@2114.17,1287.4 2240.16,1287.4 2295.28,1232.28 R20.1@2299.21,1232.28 C14.1@2374.02,1232.28
NET00022: C1.2 D1.17 R1.1 R2.2 | length 377.4
  Top Layer, Top w9.84: v1(1570.87,1381.89) 1675.2,1381.89 C1.2@1677.17,1383.86 1679.13,1381.89 1750,1381.89 R2.2@1751.97,1383.86 1753.94,1381.89 1755.91,1381.89 1787.4,1350.39 1787.4,1330.71 1822.83,1295.28 R1.1@1826.77,1295.28
  Bottom Layer, Bottom w9.84: v1(1570.87,1381.89) D1.17@1641.73,1381.89
NET00023: R28.1 R36.2 XT5.1 | length 324
  Top Layer, Top w9.84: v1(4011.81,724.41) R36.2@4011.81,785.43
  Bottom Layer, Bottom w9.84: v1(4011.81,724.41) 4011.81,673.23 R28.1@4027.56,657.48
  Bottom Layer, Bottom w39.37: XT5.1@3929.92,531.5 3988.19,589.76 3988.19,657.48 R28.1@4027.56,657.48
NET00024: R29.1 R37.2 XT5.2 | length 322.7
  Top Layer, Top w9.84: v1(4240.16,724.41) R37.2@4240.16,785.43
  Bottom Layer, Bottom w9.84: R29.1@4224.41,657.48 4240.16,673.23 v1(4240.16,724.41)
  Bottom Layer, Bottom w39.37: XT5.2@4129.92,531.5 4185.04,586.61 4185.04,657.48 R29.1@4224.41,657.48
NET00025: R31.1 R39.2 XT6.2 | length 322
  Top Layer, Top w9.84: v1(3838.58,724.41) R39.2@3838.58,785.43
  Bottom Layer, Bottom w9.84: R31.1@3822.83,657.48 3838.58,673.23 v1(3838.58,724.41)
  Bottom Layer, Bottom w39.37: XT6.2@3729.92,531.5 3783.46,585.04 3783.46,657.48 R31.1@3822.83,657.48
NET00026: R30.1 R38.2 XT6.1 | length 323.3
  Top Layer, Top w9.84: v1(3610.24,724.41) R38.2@3610.24,785.43
  Bottom Layer, Bottom w9.84: v1(3610.24,724.41) 3610.24,673.23 R30.1@3625.98,657.48
  Bottom Layer, Bottom w39.37: XT6.1@3529.92,531.5 3586.61,588.19 3586.61,657.48 R30.1@3625.98,657.48
NET00027: R33.1 R41.2 XT7.2 | length 321.4
  Top Layer, Top w9.84: v1(3437.01,724.41) R41.2@3437.01,785.43
  Bottom Layer, Bottom w9.84: R33.1@3421.26,657.48 3437.01,673.23 v1(3437.01,724.41)
  Bottom Layer, Bottom w39.37: XT7.2@3329.92,531.5 3381.89,583.46 3381.89,657.48 R33.1@3421.26,657.48
NET00028: 
NET00029: BQ1.2 D1.22 | length 106.3
  Bottom Layer, Bottom w9.84: BQ1.2@1535.43,1539.37 D1.22@1641.73,1539.37
NET00030: R32.1 R40.2 XT7.1 | length 322.7
  Top Layer, Top w9.84: v1(3208.66,724.41) R40.2@3208.66,785.43
  Bottom Layer, Bottom w9.84: v1(3208.66,724.41) 3208.66,673.23 R32.1@3224.41,657.48
  Bottom Layer, Bottom w39.37: XT7.1@3129.92,531.5 3185.04,586.61 3185.04,657.48 R32.1@3224.41,657.48
NET00031: BQ1.1 D1.23 | length 234
  Bottom Layer, Bottom w9.84: BQ1.1@1535.43,1736.22 1653.54,1618.11 D1.23@1720.47,1618.11
NET00032: BQ2.2 D4.22 | length 106.3
  Bottom Layer, Bottom w9.84: BQ2.2@3429.13,1460.63 D4.22@3535.43,1460.63
NET00033: D4.19 R44.1 | length 196.7
  Top Layer, Top w9.84: v1(3464.57,1346.46) 3500,1346.46 3527.56,1374.02 R44.1@3570.87,1374.02
  Bottom Layer, Bottom w9.84: v1(3464.57,1346.46) 3484.25,1366.14 D4.19@3535.43,1366.14
NET00034: BQ2.1 D4.23 | length 234
  Bottom Layer, Bottom w9.84: BQ2.1@3429.13,1657.48 3547.24,1539.37 D4.23@3614.17,1539.37
NET00035: D4.25 R49.2 | length 133.5
  Bottom Layer, Bottom w9.84: D4.25@3677.17,1539.37 3677.17,1590.55 3732.28,1645.67 R49.2@3734.25,1649.61
NET00036: D4.24 R50.2 | length 110.7
  Bottom Layer, Bottom w9.84: D4.24@3645.67,1539.37 3645.67,1645.67 R50.2@3647.64,1649.61
NET00037: D4.41 R46.2 | length 240.6
  Top Layer, Top w9.84: R46.2@3944.88,1214.57 3946.85,1212.6 4062.99,1212.6 v1(4090.55,1240.16)
  Bottom Layer, Bottom w9.84: D4.41@4007.87,1240.16 v1(4090.55,1240.16)
NET00038: D4.39 R47.2 | length 454.2
  Top Layer, Top w9.84: R47.2@3870.08,1214.57 3872.05,1212.6 3874.02,1212.6 3917.32,1169.29 4062.99,1169.29 4122.05,1228.35 4122.05,1251.97 v1(4090.55,1283.46)
  Bottom Layer, Bottom w9.84: D4.39@4007.87,1303.15 4070.87,1303.15 v1(4090.55,1283.46)
NET00039: D4.38 R48.2 | length 427.7
  Top Layer, Top w9.84: R48.2@3795.28,1214.57 3797.24,1216.54 3799.21,1216.54 3842.52,1259.84 4023.62,1259.84 v1(4090.55,1326.77)
  Bottom Layer, Bottom w9.84: D4.38@4007.87,1334.65 4082.68,1334.65 v1(4090.55,1326.77)
NET00040: C29.2 D4.12 | length 164.5
  Top Layer, Top w9.84: v1(3511.81,1106.3) 3511.81,1070.87 3527.56,1055.12 3566.93,1055.12 C29.2@3570.87,1053.15
  Bottom Layer, Bottom w9.84: v1(3511.81,1106.3) 3511.81,1145.67 D4.12@3535.43,1145.67
NET00041: R34.1 R42.2 XT8.1 | length 2882.3
  Top Layer, Top w9.84: v1(3129.92,3307.09) 3070.87,3248.03 2724.41,3248.03 2590.55,3114.17 2590.55,1933.07 2732.28,1791.34 3122.05,1791.34 v1(3287.4,1625.98)
  Bottom Layer, Bottom w9.84: v1(3129.92,3307.09) R34.1@3129.92,3377.95 ; R42.2@3287.4,1568.9 v1(3287.4,1625.98)
  Bottom Layer, Bottom w39.37: R34.1@3129.92,3377.95 XT8.1@3129.92,3507.87
NET00042: R35.1 R43.2 XT8.2 | length 2652.7
  Top Layer, Top w9.84: v1(2933.07,3307.09) 2893.7,3267.72 2716.54,3267.72 2570.87,3122.05 2570.87,1925.2 2724.41,1771.65 3059.06,1771.65 v1(3204.72,1625.98)
  Bottom Layer, Bottom w9.84: v1(2933.07,3307.09) R35.1@2933.07,3377.95 ; R43.2@3204.72,1568.9 v1(3204.72,1625.98)
  Bottom Layer, Bottom w39.37: XT8.2@2929.92,3507.87 2929.92,3381.1 R35.1@2933.07,3377.95
NET00043: C27.2 C28.2 D4.1 | length 420.6
  Top Layer, Top w9.84: v1(3976.38,1066.93) 4019.68,1110.24 4192.91,1110.24 ; C27.2@4192.91,1064.96 4192.91,1110.24 ; C28.2@4267.72,1064.96 4265.75,1066.93 4263.78,1066.93 4220.47,1110.24 4192.91,1110.24
  Bottom Layer, Bottom w9.84: D4.1@3929.13,1066.93 v1(3976.38,1066.93)
NET00044: C31.1 D4.42 R45.1 | length 282.7
  Bottom Layer, Bottom w9.84: D4.42@4007.87,1208.66 4133.86,1208.66 4188.98,1153.54 R45.1@4192.91,1153.54 C31.1@4267.72,1153.54
NET00045: C18.2 D4.17 R26.1 R27.2 | length 377.4
  Top Layer, Top w9.84: v1(3464.57,1303.15) 3568.9,1303.15 C18.2@3570.87,1301.18 3572.83,1303.15 3643.7,1303.15 R27.2@3645.67,1301.18 3647.64,1299.21 3649.61,1299.21 3681.1,1267.72 3681.1,1248.03 3716.54,1212.6 R26.1@3720.47,1212.6
  Bottom Layer, Bottom w9.84: v1(3464.57,1303.15) D4.17@3535.43,1303.15
NET00046: C87.1 D20.1 | length 119.7
  Top Layer, Top w19.68: v1(1665.35,2472.44) D20.1@1665.35,2527.56
  Bottom Layer, Bottom w19.68: C87.1@1661.42,2409.45 1665.35,2413.39 v1(1665.35,2472.44)
NET00047: XS2.9 XS3.11 | length 272.7
  Top Layer, Top w9.84: XS2.9@3537.01,2141.73 3539.37,2144.09 3539.37,2409.45 XS3.11@3538.98,2413.39
NET00048: C87.2 D20.6 L1.1 VD2.K
  other v1: 1480.32,2267.72 1480.32,2342.52 1480.32,2417.32 1566.93,2472.44
NET00049: XS2.10 XS3.12 | length 512.9
  Top Layer, Top w9.84: XS2.10@3537.01,2041.73 3488.19,2090.55 3488.19,2462.6 XS3.12@3538.98,2513.39
NET00050: D20.3 R195.2 R196.2 | length 310
  Top Layer, Top w9.84: v1(1665.35,2653.54) D20.3@1665.35,2606.3 1748.03,2606.3 1783.46,2570.87 R196.2@1783.46,2501.97
  Bottom Layer, Bottom w9.84: R195.2@1604.33,2653.54 v1(1665.35,2653.54)
NET00051: XS2.7 XS3.13 | length 274.5
  Top Layer, Top w9.84: XS2.7@3637.01,2141.73 3641.73,2146.46 3641.73,2409.45 XS3.13@3638.98,2413.39
NET00052: XS2.8 XS3.14 | length 511
  Top Layer, Top w9.84: XS2.8@3637.01,2041.73 3590.55,2088.19 3590.55,2464.96 XS3.14@3638.98,2513.39
NET00053: XS2.5 XS3.15 | length 273.1
  Top Layer, Top w9.84: XS2.5@3737.01,2141.73 3740.16,2144.88 3740.16,2409.45 XS3.15@3738.98,2413.39
NET00054: XS2.6 XS3.16 | length 512.3
  Top Layer, Top w9.84: XS2.6@3737.01,2041.73 3688.98,2089.76 3688.98,2463.39 XS3.16@3738.98,2513.39
NET00055: XS2.3 XS3.17 | length 272.3
  Top Layer, Top w9.84: XS2.3@3837.01,2141.73 3838.58,2143.31 3838.58,2405.51 XS3.17@3839.37,2413.39
NET00056: XS2.4 XS3.18 | length 513.7
  Top Layer, Top w9.84: XS2.4@3837.01,2041.73 3787.4,2091.34 3787.4,2461.42 XS3.18@3839.37,2513.39
NET00057: R53.1 R61.2 XT9.1 | length 320.4
  Top Layer, Top w9.84: v1(5905.51,724.41) R61.2@5905.51,785.43
  Bottom Layer, Bottom w9.84: v1(5905.51,724.41) 5905.51,673.23 R53.1@5921.26,657.48
  Bottom Layer, Bottom w39.37: R53.1@5921.26,657.48 5960.63,657.48 5960.63,581.1 XT9.1@6010.24,531.5
NET00058: R54.1 R62.2 XT9.2 | length 321.7
  Top Layer, Top w9.84: v1(6133.86,724.41) R62.2@6133.86,785.43
  Bottom Layer, Bottom w9.84: R54.1@6118.11,657.48 6133.86,673.23 v1(6133.86,724.41)
  Bottom Layer, Bottom w39.37: R54.1@6118.11,657.48 6157.48,657.48 6157.48,584.25 XT9.2@6210.24,531.5
NET00059: R56.1 R64.2 XT10.2 | length 322.3
  Top Layer, Top w9.84: v1(5732.28,724.41) R64.2@5732.28,785.43
  Bottom Layer, Bottom w9.84: R56.1@5716.54,657.48 5732.28,673.23 v1(5732.28,724.41)
  Bottom Layer, Bottom w39.37: R56.1@5716.54,657.48 5755.91,657.48 5755.91,585.83 XT10.2@5810.24,531.5
NET00060: R55.1 R63.2 XT10.1 | length 321
  Top Layer, Top w9.84: v1(5503.94,724.41) R63.2@5503.94,785.43
  Bottom Layer, Bottom w9.84: v1(5503.94,724.41) 5503.94,673.23 R55.1@5519.69,657.48
  Bottom Layer, Bottom w39.37: R55.1@5519.69,657.48 5559.06,657.48 5559.06,582.68 XT10.1@5610.24,531.5
NET00061: R58.1 R66.2 XT11.2 | length 323
  Top Layer, Top w9.84: v1(5330.71,724.41) R66.2@5330.71,785.43
  Bottom Layer, Bottom w9.84: R58.1@5314.96,657.48 5330.71,673.23 v1(5330.71,724.41)
  Bottom Layer, Bottom w39.37: R58.1@5314.96,657.48 5354.33,657.48 5354.33,587.4 XT11.2@5410.24,531.5
NET00062: R57.1 R65.2 XT11.1 | length 321.7
  Top Layer, Top w9.84: v1(5102.36,724.41) R65.2@5102.36,785.43
  Bottom Layer, Bottom w9.84: v1(5102.36,724.41) 5102.36,673.23 R57.1@5118.11,657.48
  Bottom Layer, Bottom w39.37: R57.1@5118.11,657.48 5157.48,657.48 5157.48,584.25 XT11.1@5210.24,531.5
NET00063: BQ3.2 D7.22 | length 106.3
  Bottom Layer, Bottom w9.84: BQ3.2@5322.83,1460.63 D7.22@5429.13,1460.63
NET00064: D7.19 R69.1 | length 198.4
  Top Layer, Top w9.84: v1(5358.27,1346.46) 5389.76,1346.46 5421.26,1377.95 R69.1@5464.57,1377.95
  Bottom Layer, Bottom w9.84: v1(5358.27,1346.46) 5377.95,1366.14 D7.19@5429.13,1366.14
NET00065: BQ3.1 D7.23 | length 234
  Bottom Layer, Bottom w9.84: BQ3.1@5322.83,1657.48 5440.94,1539.37 D7.23@5507.87,1539.37
NET00066: D7.25 R74.2 | length 131.9
  Bottom Layer, Bottom w9.84: D7.25@5570.87,1539.37 5570.87,1594.49 5622.05,1645.67 R74.2@5624.02,1649.61
NET00067: D7.24 R75.2 | length 112.2
  Bottom Layer, Bottom w9.84: R75.2@5537.4,1649.61 5539.37,1649.61 D7.24@5539.37,1539.37
NET00068: D7.41 R71.2 | length 237.3
  Top Layer, Top w9.84: R71.2@5838.58,1218.5 5840.55,1220.47 5964.57,1220.47 v1(5984.25,1240.16)
  Bottom Layer, Bottom w9.84: D7.41@5901.57,1240.16 v1(5984.25,1240.16)
NET00069: D7.39 R72.2 | length 455.8
  Top Layer, Top w9.84: R72.2@5763.78,1218.5 5765.75,1216.54 5767.72,1216.54 5814.96,1169.29 5956.69,1169.29 6015.75,1228.35 6015.75,1251.97 v1(5984.25,1283.46)
  Bottom Layer, Bottom w9.84: D7.39@5901.57,1303.15 5964.57,1303.15 v1(5984.25,1283.46)
NET00070: D7.38 R73.2 | length 426.1
  Top Layer, Top w9.84: R73.2@5688.98,1218.5 5690.94,1220.47 5692.91,1220.47 5736.22,1263.78 5921.26,1263.78 v1(5984.25,1326.77)
  Bottom Layer, Bottom w9.84: D7.38@5901.57,1334.65 5976.38,1334.65 v1(5984.25,1326.77)
NET00071: C46.2 D7.12 | length 164.5
  Top Layer, Top w9.84: v1(5405.51,1106.3) 5405.51,1070.87 5421.26,1055.12 5460.63,1055.12 C46.2@5464.57,1053.15
  Bottom Layer, Bottom w9.84: v1(5405.51,1106.3) 5405.51,1145.67 D7.12@5429.13,1145.67
NET00072: R59.1 R67.2 XT12.1 | length 3307.5
  Top Layer, Top w9.84: v1(3527.56,3307.09) 3566.93,3267.72 4216.54,3267.72 4362.2,3122.05 4362.2,1929.13 4496.06,1795.28 5011.81,1795.28 v1(5181.1,1625.98)
  Bottom Layer, Bottom w9.84: v1(3527.56,3307.09) R59.1@3527.56,3377.95 ; R67.2@5181.1,1568.9 v1(5181.1,1625.98)
  Bottom Layer, Bottom w39.37: R59.1@3527.56,3377.95 3529.92,3380.32 XT12.1@3529.92,3507.87
NET00073: R60.1 R68.2 XT12.2 | length 3421
  Top Layer, Top w9.84: v1(3330.71,3307.09) 3389.76,3248.03 4208.66,3248.03 4342.52,3114.17 4342.52,1921.26 4488.19,1775.59 4948.82,1775.59 v1(5098.43,1625.98)
  Bottom Layer, Bottom w9.84: v1(3330.71,3307.09) R60.1@3330.71,3377.95 ; R68.2@5098.43,1568.9 v1(5098.43,1625.98)
  Bottom Layer, Bottom w39.37: XT12.2@3329.92,3507.87 3329.92,3378.74 R60.1@3330.71,3377.95
NET00074: C44.2 C45.2 D7.1 | length 420.6
  Top Layer, Top w9.84: v1(5870.08,1066.93) 5913.39,1110.24 6086.61,1110.24 ; C44.2@6086.61,1064.96 6086.61,1110.24 ; C45.2@6161.42,1064.96 6159.45,1066.93 6157.48,1066.93 6114.17,1110.24 6086.61,1110.24
  Bottom Layer, Bottom w9.84: D7.1@5822.83,1066.93 v1(5870.08,1066.93)
NET00075: C48.1 D7.42 R70.1 | length 282.7
  Bottom Layer, Bottom w9.84: D7.42@5901.57,1208.66 6027.56,1208.66 6082.68,1153.54 R70.1@6086.61,1153.54 C48.1@6161.42,1153.54
NET00076: C35.2 D7.17 R51.1 R52.2 | length 380.9
  Top Layer, Top w9.84: v1(5358.27,1303.15) 5456.69,1303.15 5462.6,1307.09 C35.2@5464.57,1305.12 5466.54,1307.09 5537.4,1307.09 R52.2@5539.37,1305.12 5541.34,1303.15 5547.24,1303.15 5574.8,1275.59 5574.8,1251.97 5610.24,1216.54 R51.1@5614.17,1216.54
  Bottom Layer, Bottom w9.84: v1(5358.27,1303.15) D7.17@5429.13,1303.15
NET00077: R78.1 R86.2 XT13.1 | length 516.9
  Top Layer, Top w9.84: v1(7771.65,803.15) R86.2@7771.65,864.17
  Bottom Layer, Bottom w9.84: v1(7771.65,803.15) 7771.65,751.97 R78.1@7787.4,736.22
  Bottom Layer, Bottom w39.37: R78.1@7787.4,736.22 7830.71,736.22 7905.51,661.42 7955.12,661.42 XT13.1@8085.04,531.5
NET00078: R79.1 R87.2 XT13.2 | length 520.1
  Top Layer, Top w9.84: v1(8000,803.15) R87.2@8000,864.17
  Bottom Layer, Bottom w9.84: R79.1@7984.25,736.22 8000,751.97 v1(8000,803.15)
  Bottom Layer, Bottom w39.37: R79.1@7984.25,736.22 8080.31,736.22 XT13.2@8285.04,531.5
NET00079: R81.1 R89.2 XT14.2 | length 521.6
  Top Layer, Top w9.84: v1(7598.43,803.15) R89.2@7598.43,864.17
  Bottom Layer, Bottom w9.84: R81.1@7582.68,736.22 7598.43,751.97 v1(7598.43,803.15)
  Bottom Layer, Bottom w39.37: R81.1@7582.68,736.22 7625.98,736.22 7700.79,661.42 7755.12,661.42 XT14.2@7885.04,531.5
NET00080: R80.1 R88.2 XT14.1 | length 518.5
  Top Layer, Top w9.84: v1(7370.08,803.15) R88.2@7370.08,864.17
  Bottom Layer, Bottom w9.84: v1(7370.08,803.15) 7370.08,751.97 R80.1@7385.83,736.22
  Bottom Layer, Bottom w39.37: R80.1@7385.83,736.22 7429.13,736.22 7503.94,661.42 7555.12,661.42 XT14.1@7685.04,531.5
NET00081: R83.1 R91.2 XT15.2 | length 519.3
  Top Layer, Top w9.84: v1(7200.79,803.15) R91.2@7200.79,864.17
  Bottom Layer, Bottom w9.84: R83.1@7185.04,736.22 7200.79,751.97 v1(7200.79,803.15)
  Bottom Layer, Bottom w39.37: R83.1@7185.04,736.22 7228.35,736.22 7303.15,661.42 7355.12,661.42 XT15.2@7485.04,531.5